# EAGLE board Lm4780 Eagle board  (EAGLE 5.09)
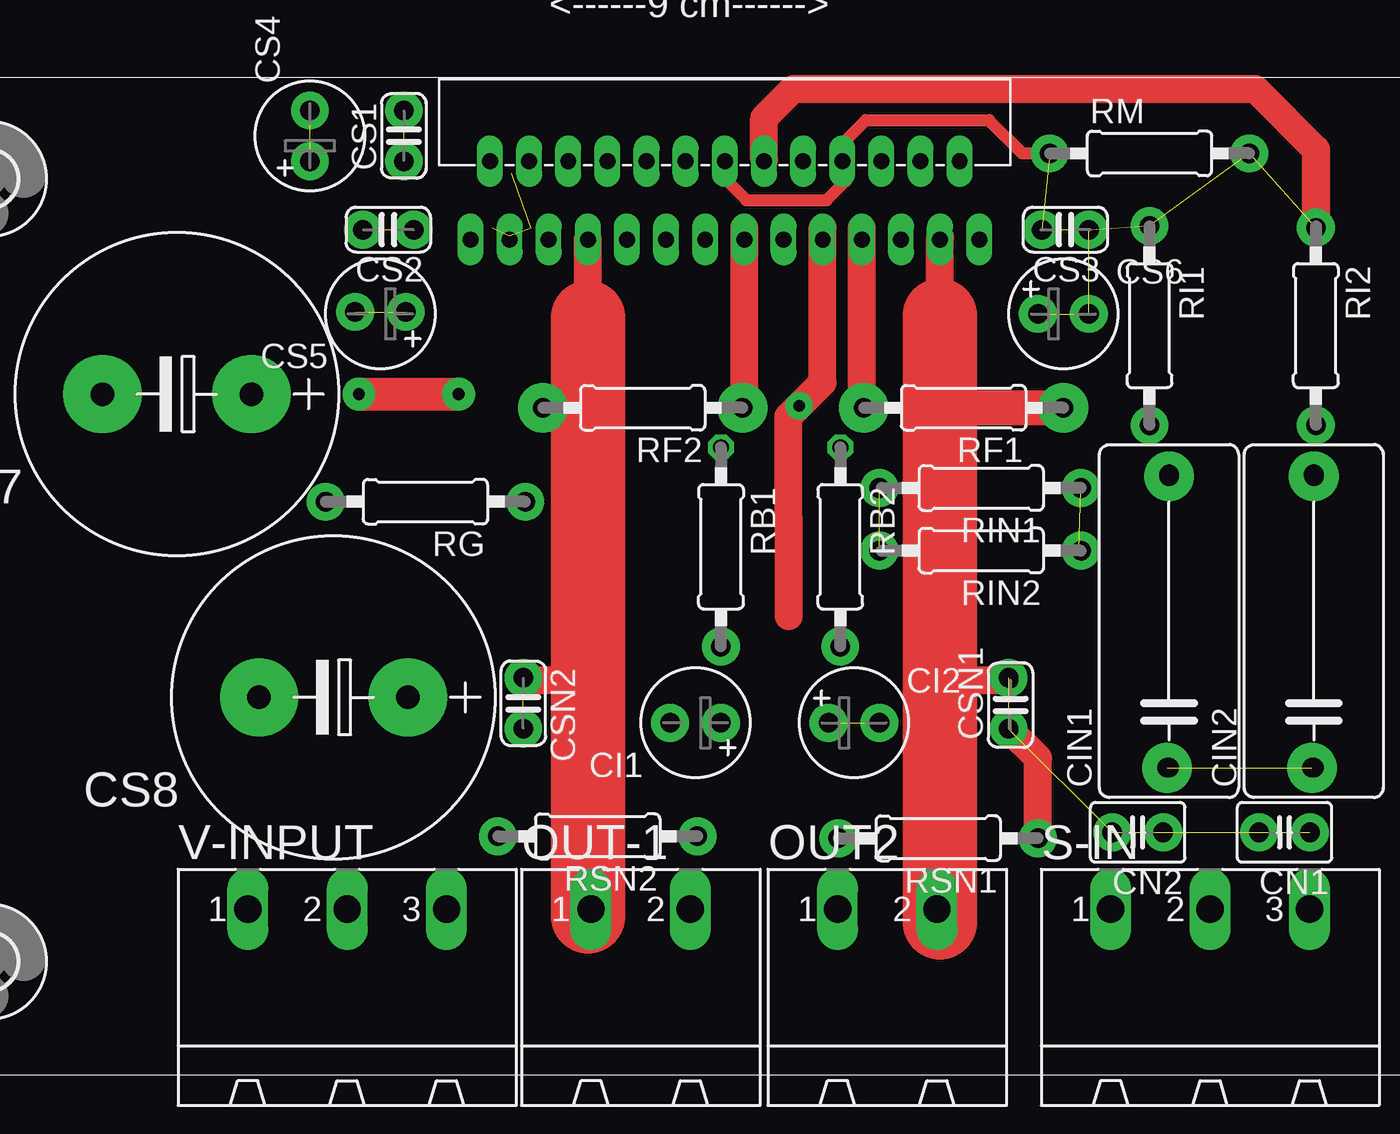
[diagram p0: board, top side]
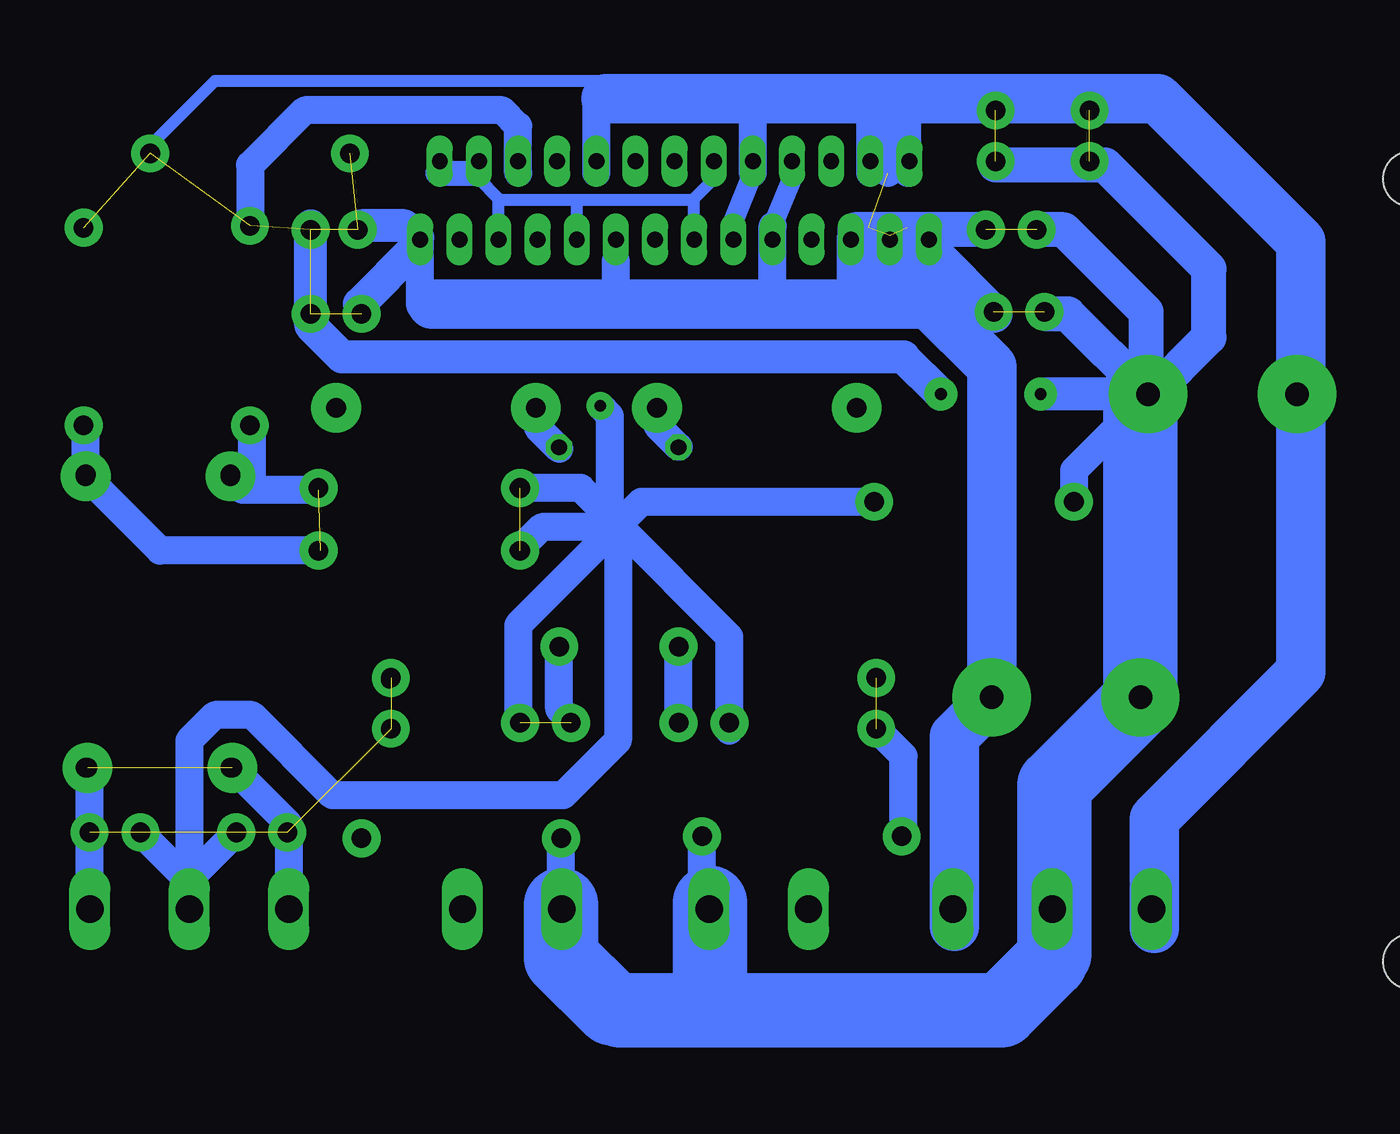
[diagram p1: board, bottom side, seen from below]

No outline drawn. Coordinates in mm, seen from the top.
Copper layers (1*16): Top 0.035mm / dielectric 1.5mm / Bottom 0.035mm
Design rules "default": minimum track width 10mil, minimum drill 24mil, track to track 8mil, track to pad 8mil, pad to pad 8mil, via to via 8mil, smd to smd 8mil, copper to edge 40mil, drill to drill 8mil, minimum pad ring 10mil, minimum via ring 8mil, stop-mask expansion 4mil, vias tented up to drill 0mil, thermal gap 10mil

## Footprints (pad centres in the part's own frame; a part is rotated, then mirrored left to right if it is on the bottom)
E2,5-6 = drill 0.813 pad 1.6 round: + -1.27,0 | drill 0.813 pad 1.6 octagon: - 1.27,0
C150-072X183 = drill 1.016 octagon: 1 -7.493,0; 2 7.493,0
C025-030X050 = drill 0.813 octagon: 1 -1.27,0; 2 1.27,0
C025-024X044 = drill 0.813 octagon: 1 -1.27,0; 2 1.27,0
E7,5-16 = drill 1.016 pad 3.15 round: + -3.81,0 | drill 1.016 pad 3.15 octagon: - 3.81,0
TO220-27 = drill 0.813 pad 1.27 long: 1 -13,-2; 2 -12,2; 3 -11,-2; 4 -10,2; 5 -9,-2; 6 -8,2; 7 -7,-2; 8 -6,2; 9 -5,-2; 10 -4,2; 11 -3,-2; 12 -2,2; 13 -1,-2; 14 0,2; 15 1,-2; 16 2,2; 17 3,-2; 18 4,2; 19 5,-2; 20 6,2; 21 7,-2; 22 8,2; 23 9,-2; 24 10,2; 25 11,-2; 26 12,2; 27 13,-2
2,8 = hole 2.8: 0,0
MSTBA2 = drill 1.397 long: 1 -2.54,5.08; 2 2.54,5.08
0207/10 = drill 0.813 octagon: 1 -5.08,0; 2 5.08,0
MSTBA3 = drill 1.397 long: 1 -5.08,5.08; 2 0,5.08; 3 5.08,5.08

## Placement (x,y rotation side)
CI1  68uf  [E2,5-6]  -46.31,18.08 180 top
CI2  68uf  [E2,5-6]  -38.21,18.08 0 top
CIN1  1uf  [C150-072X183]  -22.11,23.28 90 top
CIN2  1uf  [C150-072X183]  -14.71,23.28 90 top
CN1  15pf  [C025-030X050]  -16.21,12.48 180 top
CN2  15pf  [C025-030X050]  -23.71,12.48 180 top
CS1  100n  [C025-024X044]  -61.21,48.08 90 top
CS2  100n  [C025-024X044]  -62.01,43.28 180 top
CS3  100n  [C025-024X044]  -27.41,43.28 180 top
CS4  10uf  [E2,5-6]  -66.01,48.08 90 top
CS5  10uf  [E2,5-6]  -62.41,38.98 180 top
CS6  10uf  [E2,5-6]  -27.51,38.98 0 top
CS7  1000uf 35V  [E7,5-16]  -72.81,34.88 180 top
CS8  1000uf 35v  [E7,5-16]  -64.81,19.38 180 top
CSN1  100n  [C025-024X044]  -30.21,18.98 90 top
CSN2  100n  [C025-024X044]  -55.11,19.08 270 top
E$1  lm4780  [TO220-27]  -44.81,44.78 0 top
E$4  [2,8]  -82.41,45.88 0 top
E$6  [2,8]  -82.41,5.88 0 top
E$12  [2,8]  -5.91,45.38 0 top
E$86  [2,8]  -5.41,5.68 0 top
OUT2  [MSTBA2]  -36.51,3.48 0 top
OUT-1  [MSTBA2]  -49.11,3.48 0 top
RB1  1k  [0207/10]  -45.01,27.08 270 top
RB2  1k  [0207/10]  -38.91,27.08 270 top
RF1  20k  [0207/10]  -32.61,34.18 180 top
RF2  20k  [0207/10]  -49.01,34.18 180 top
RG  2,7ohm  [0207/10]  -60.11,29.38 180 top
RI1  1k  [0207/10]  -23.11,38.38 270 top
RI2  1k  [0207/10]  -14.61,38.38 270 top
RIN1  15k  [0207/10]  -31.71,30.08 180 top
RIN2  15k  [0207/10]  -31.71,26.88 180 top
RM  10K  [0207/10]  -23.11,47.18 0 top
RSN1  2,7ohm  [0207/10]  -33.91,12.18 180 top
RSN2  2,7ohm  [0207/10]  -51.31,12.28 180 top
S-IN  [MSTBA3]  -20.01,3.48 0 top
V-INPUT  [MSTBA3]  -64.11,3.48 0 top

## Library data of the parts
CI1 CI2 CIN1 CIN2 CN1 CN2 CS4-CS8 = resistor
CS1-CS3 CSN1 CSN2 = ref-packages-longpad
E$1 = LM&OPA
E$4 E$6 E$12 E$86 = holes
OUT2 OUT-1 S-IN V-INPUT = con-phoenix-508
RB1 RB2 RF1 RF2 RG RI1 RI2 RIN1 RIN2 RM RSN1 RSN2 = rcl

## Nets
S$65: E$1.7

## Tracks (layer width: path | path; a pad name or v marks a point on that pad's centre or on a via)
CI2  (via drill 1 pad 1.93)  (1 unrouted)
  other vias: -39.51,18.08 -36.91,18.08
S$1
  Bottom 1.422: -41.81,39.38 -41.81,41.68
S$2
  Bottom 1.676: -28.81,43.48 -31.01,43.48 -31.61,42.88
S$3
  Bottom 1.676: -28.71,39.08 -28.71,39.48 -31.61,42.38
S$4
  Bottom 1.016: -50.81,47.38 -50.81,45.88 -49.81,43.48
  Bottom 1.422: -49.81,39.68 -49.81,43.48
S$5
  Top 1.422: -42.81,46.88 -42.81,48.98 -41.31,50.48 -17.71,50.48 -14.61,47.38 -14.61,43.58
S$6
  Bottom 1.422: -31.81,39.38 -31.81,42.88
S$8
  Bottom 1.422: -53.81,39.68 -53.81,42.88
S$9
  Bottom 1.016: -47.81,43.68 -48.81,46.18
  Bottom 1.422: -48.81,46.18 -48.81,49.38
S$10
  Bottom 1.676: -26.21,43.48 -26.21,38.38 -27.81,36.78 -56.51,36.78 -58.41,34.88
S$11
  Bottom 3.81: -39.01,8.78 -39.01,6.08 -41.61,3.48
S$12  (via drill 1.2 pad 4)
  Bottom 2.54: -57.71,39.58 -61.01,36.28 v-61.01,19.38 -61.01,19.28 -59.11,17.38 -59.11,7.68
S$13
  Bottom 1.778: -61.21,46.58 -66.81,46.58 -72.11,41.28 -72.11,37.78 -69.11,34.78
S$14  (via drill 1.2 pad 4)
  Bottom 3.81: -68.61,34.98 v-68.61,19.38 -68.61,19.28 -64.21,14.88 -64.21,6.28
S$15
  Bottom 2.54: -41.31,49.98 -69.51,49.98 -76.81,42.68 -76.81,20.68 -69.31,13.18 -69.31,7.58
S$16
  Bottom 1.778: -60.61,43.28 -54.01,43.28
S$17
  Bottom 0.61: -46.81,45.88 -45.81,44.88 -45.81,43.68
S$18
  Bottom 2.54: -57.31,39.48 -32.41,39.48
S$19  (via drill 1 pad 2.54)
  Bottom 1.422: -43.91,34.28 v-43.91,34.18 -43.91,33.28 -45.01,32.18
S$20
  Bottom 1.778: -63.31,43.28 -64.71,43.28 -68.91,39.08 -68.91,35.78 -69.01,35.68
S$21
  Bottom 3.81: -46.61,5.28 -46.61,8.88
S$22  (via drill 1 pad 2.54)  (1 unrouted)
  Bottom 1.422: v-22.11,30.68 -22.71,29.98 -26.61,29.98 | -14.71,33.18 v-14.71,30.68 -18.51,26.88 -26.71,26.88
S$23
  Bottom 1.422: -56.71,46.18 -56.71,49.38
S$24
  Bottom 1.93: -61.11,38.98 -58.01,42.08
S$25  (via drill 0.6 pad 1.68, 1.2 pad 4)
  Top 1.676: v-63.51,34.88 -58.41,34.88
  Bottom 1.422: -69.11,34.88 -65.21,30.98 -65.21,29.38
  Bottom 1.676: v-63.51,34.88 v-69.01,34.88 -69.11,34.88 -69.01,34.78
  Bottom 1.778: -63.81,38.98 -64.91,38.98 v-69.01,34.88
S$26
  Bottom 1.422: -25.11,7.48 -25.11,12.88 -22.11,15.88
S$27
  Top 1.422: -33.81,38.78 -33.81,42.88
  Top 3.81: -33.81,38.88 -33.81,38.78 -33.81,7.88
S$28  (via drill 0.6 pad 1.68)
  other vias: -58.41,34.88
S$29
  Bottom 1.422: -38.91,21.98 -38.91,18.78 -39.51,18.18
S$30
  Bottom 0.61: -45.61,44.78 -35.91,44.78
S$31
  Top 1.422: -37.81,34.08 -37.81,43.38
S$32
  Bottom 1.422: -54.81,46.18 -54.81,49.38
S$33
  Bottom 1.422: -36.91,30.08 -40.01,30.08 -41.81,28.28
S$34
  Bottom 1.422: -45.01,18.28 -45.01,21.98
S$35
  Bottom 1.422: -37.81,34.28 -37.81,33.18 -38.91,32.08
S$36  (via drill 0.6 pad 1.42)
  Bottom 1.422: -20.01,9.98 -17.51,12.48 | -20.01,9.98 -20.01,8.18 | -20.01,10.08 -22.41,12.48 | -20.01,10.08 -20.01,9.98 | -20.01,10.08 -20.01,17.18 -21.31,18.48 -23.21,18.48 -27.31,14.38 -39.11,14.38 -41.91,17.18 -41.91,28.18 | -36.81,26.88 -38.01,28.08 -41.81,28.08 | -36.81,17.88 -36.81,23.08 -41.81,28.08 | v-41.01,34.28 -41.5,33.77 -41.5,28.37 -41.91,28.18 | -55.11,29.38 -43.11,29.38 -41.91,28.18 | -41.91,28.18 -41.81,28.08 | -41.91,28.18 -47.61,22.48 -47.61,17.68
S$37  (via drill 1 pad 1.93)
  other vias: -14.61,33.28
S$38
  Bottom 1.422: -57.81,41.68 -57.81,39.58
S$39
  Bottom 1.422: -40.81,46.18 -40.81,49.78
S$40  (via drill 1 pad 2.54)
  Top 1.778: -54.21,34.18 v-54.11,34.18 -53.21,34.18
S$41
  Bottom 1.422: -36.81,46.18 -36.81,48.58 -36.01,49.38 -25.91,49.38 -23.11,46.58 -23.11,43.58
S$42
  Bottom 1.422: -14.91,7.88 -14.91,15.88
S$43  (via drill 1 pad 1.93)  (1 unrouted)
  other vias: -36.91,30.08 -36.91,26.88
S$44  (via drill 1 pad 1.93)  (1 unrouted)
  other vias: -55.11,20.38 -55.11,17.78
S$45
  Top 1.422: -43.81,34.08 -43.81,43.38
S$46
  Bottom 1.27: -32.71,46.18 -34.81,46.18
S$47  (via drill 1 pad 1.93)
  other vias: -45.01,18.08
S$48  (via drill 1 pad 1.93)
  Bottom 1.422: -39.01,9.18 v-39.01,12.18
S$49
  Bottom 0.61: -34.81,45.88 -35.81,44.88 -35.81,43.48
S$50  (via drill 1 pad 1.93)
  Top 1.422: v-28.81,12.18 -28.81,16.28 -30.31,17.78
S$51
  Top 1.422: -33.21,20.28 -30.31,20.28
S$52
  Bottom 0.61: -39.81,43.48 -39.81,44.68
S$53
  Bottom 1.422: -56.51,12.18 -56.51,16.38 -55.11,17.78
S$54
  Top 1.422: -55.11,20.28 -52.61,20.28 -52.51,20.18
S$55  (via drill 1 pad 1.93)  (1 unrouted)
  other vias: -60.71,43.28 -63.31,43.28
S$56
  Top 1.422: -39.81,43.38 -39.81,35.48 -41.01,34.28
S$57  (via drill 1 pad 1.93)
  other vias: -26.61,30.08
S$58  (via drill 1 pad 1.93)
  other vias: -65.21,29.38
S$62
  Bottom 3.81: -64.01,5.88 -61.51,3.38 -42.01,3.38
S$64  (via drill 1 pad 1.93)
  other vias: -45.01,21.98
S$65
  Top 1.422: -51.81,38.78 E$1.7
  Top 3.81: -51.81,8.18 -51.81,38.78
S$66  (via drill 1 pad 2.54)
  other vias: -37.71,34.18
S$67
  Top 1.422: -41.01,34.28 -41.57,33.73 -41.55,23.54
S$68  (via drill 1.2 pad 4)
  other vias: -76.61,34.88
S$69  (3 unrouted)
  Bottom 1.422: -55.81,39.58 -55.81,42.98 | -56.71,41.28 -56.71,43.38 | -54.71,41.28 -54.71,43.38 | -55.71,46.18 -55.71,48.28
S$72  (via drill 1 pad 1.93)
  Bottom 1.422: -46.21,12.38 v-46.21,12.28 -46.21,9.38
S$73
  Top 0.61: -38.81,47.68 -37.61,48.88 -31.31,48.88 -29.61,47.18 -28.51,47.18
S$75  (via drill 1 pad 1.93)  (7 unrouted)
  other vias: -28.61,43.28 -26.21,43.28 -14.61,43.38 -23.11,43.48 -26.21,38.98 -28.81,38.98 -18.01,47.18 -28.21,47.18
S$76  (via drill 1 pad 1.93)  (5 unrouted)
  other vias: -30.31,20.38 -30.31,17.78 -25.01,12.48 -22.41,12.48 -17.51,12.48 -14.91,12.48
S$77  (via drill 1 pad 1.93)
  other vias: -38.91,21.98
S$78  (via drill 1 pad 1.93)
  other vias: -55.01,29.38
S$79  (via drill 1 pad 1.93)  (1 unrouted)
  other vias: -66.01,49.38 -66.01,46.78
S$584  (via drill 1 pad 1.93)  (1 unrouted)
  other vias: -61.21,49.38 -61.21,46.78
S$635  (via drill 1 pad 1.93)  (1 unrouted)
  other vias: -61.11,39.08 -63.71,39.08
S$640  (via drill 1 pad 1.93)
  other vias: -56.41,12.28
S$641  (via drill 1 pad 1.93)
  other vias: -47.61,18.08
S$642
  Bottom 1.422: -23.21,30.48 -23.21,32.88
S$643  (via drill 1 pad 2.54)  (1 unrouted)
  other vias: -14.81,15.78 -22.21,15.78
S$644  (via drill 1 pad 2.54)
  Top 1.778: -32.11,34.18 v-27.51,34.18
S$645  (via drill 1 pad 1.93)
  other vias: -26.61,26.88
S$646  (via drill 1 pad 1.93)
  other vias: -23.11,33.28
S$647
  Bottom 0.61: -17.91,47.48 -21.31,50.88 -42.71,50.88
S$648
  Top 0.61: -44.81,45.88 -43.71,44.78 -39.61,44.78 -38.61,45.78

## Text on the board
Pads: Bybik 2012 | Lm4780 Rfc Brd
tPlace: <------9 cm------> | <------5 cm----->